# Altium PCB HANDS_FREE_Power_Manager_V1.PcbDoc
Units mil, origin at the board's own origin, x right, y up, seen from the top; angles counter-clockwise.
Board outline 6495 x 2557 mil, 2 copper layers (Top Layer, Bottom Layer); 43 components, 19 nets, 152 pads, 96 vias.
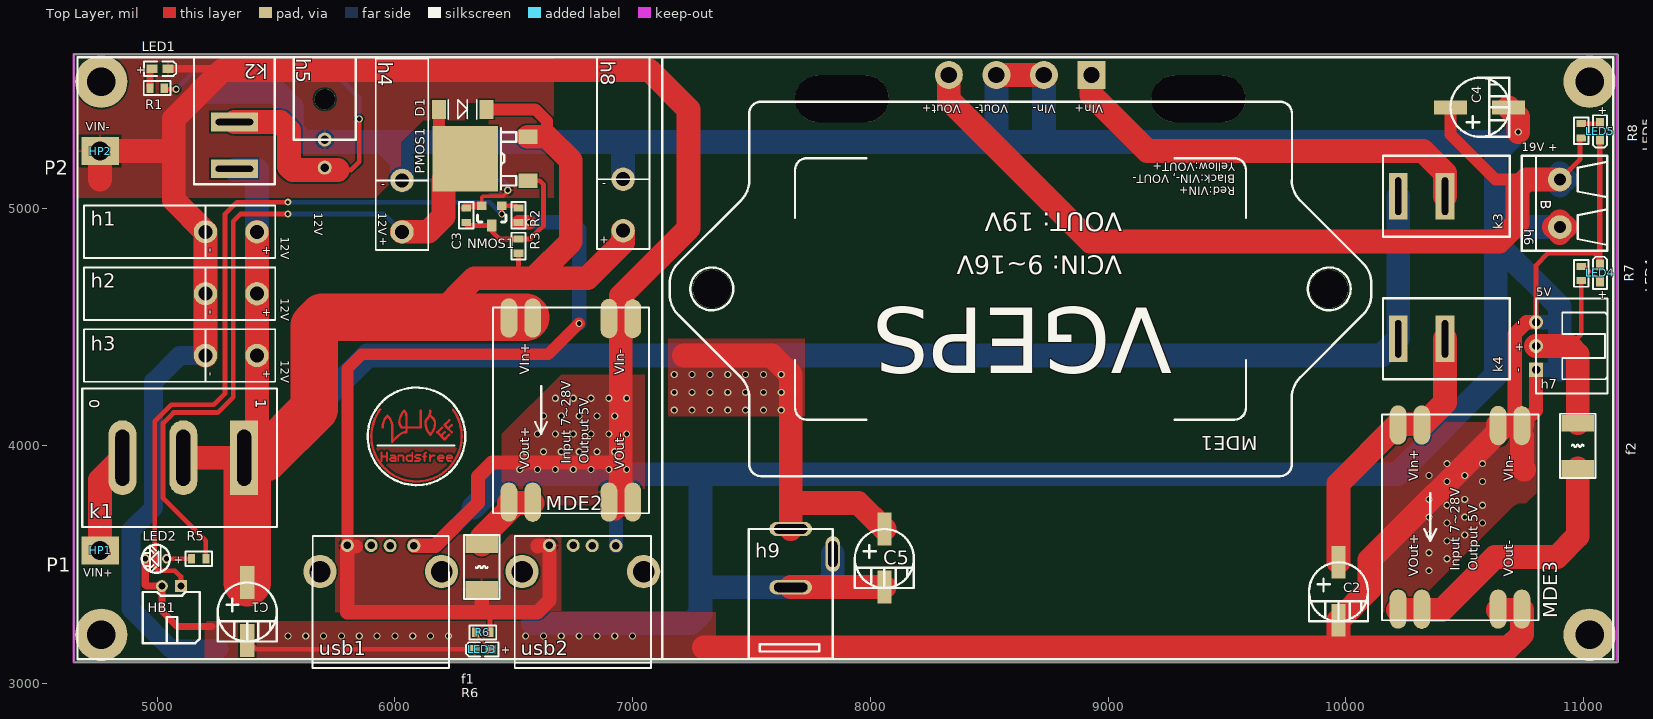
[diagram p0: Top Layer view]
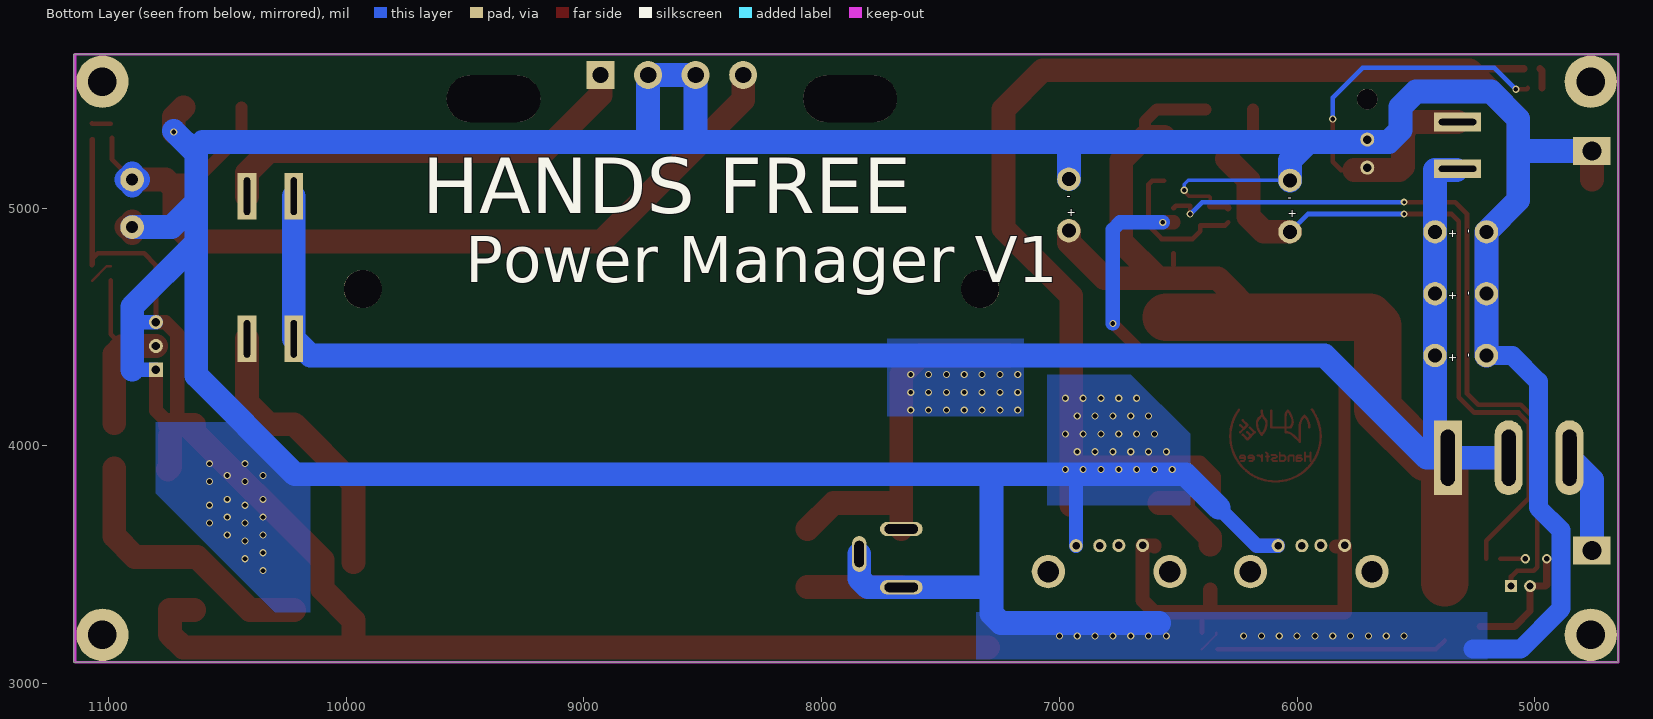
[diagram p1: Bottom Layer view, seen from below]

## Layer stack, top to bottom
Top Layer: signal copper 1.4
Dielectric: dielectric 12.6, FR-4, Dk 4.8
Bottom Layer: signal copper 1.4

## Board outline
4650,3090 11145,3090 11145,5647 4650,5647

## Design rules (kind name [scope] priority, off if disabled: settings)
Clearance [All] p1: gap=7
ComponentClearance [All] p1 off: gap=10 collisioncheckmode=3 verticalgap=10 showdistances=FALSE
Height [All] p1 off: minheight=0 maxheight=1000 prefheight=500
HoleSize [All] p1: absolutevalues=TRUE maxlimit=500 minlimit=1 maxpercent=80.000 minpercent=20.000
HoleToHoleClearance [All] p1: gap=6 allowstackedmicrovias=TRUE
MinimumSolderMaskSliver [All] p1: minsoldermaskwidth=0
PolygonConnect [All] p1: connectstyle=Relief reliefconductorwidth=10 reliefentries=4 polygonreliefangle="90 Angle"
RoutingVias [All] p1: holewidth=28 width=50 viastyle="Through Hole" minholewidth=10 minwidth=20 maxholewidth=50 maxwidth=50
SilkToSilkClearance [All] p1: silktosilkclearance=0
SilkscreenOverComponentPads SilkToSolderMaskClearance [IsPad] p1: minsilkscreentomaskgap=0
SolderMaskExpansion [All] p1: expansion=4
Width [All] p1: maxlimit=200 minlimit=7 preferedwidth=7
21 further rules are at their usual default settings.

## Components (designator, comment, footprint, x,y, rotation, side; value= is the part's Value field where it differs from the comment)
C1 "ELE_Cap_Pole" ELE_铝解电容_PV_6.3 5380,3300 r90 top
C2 "ELE_Cap_Pole" ELE_铝解电容_PV_6.3 9970,3385 r90 top
C3 "20nf" ELE_0603_P 6300,4970 r270 top
C4 "ELE_Cap_Pole" ELE_铝解电容_PV_6.3 10565,5425 r180 top
C5 "ELE_Cap_Pole" ELE_铝解电容_PV_6.3 8060,3525 r90 top
D1 "SS34" ELE_D1206 6185,5315 r0 top
f1 "ELE_Standard_Fuze_1812/3A" ELE_FUZE_1812 6360,3420 r90 top
f2 "ELE_Standard_Fuze_1812/3A" ELE_FUZE_1812 10980,4070 r270 top
h1 "HDR_Header_Power_2P" HDR_MOLEX_POWER5557_DH_2P 5420,4900 r180 top
h2 "HDR_Header_Power_2P" HDR_MOLEX_POWER5557_DH_2P 5420,4640 r180 top
h3 "HDR_Header_Power_2P" HDR_MOLEX_POWER5557_DH_2P 5420,4380 r180 top
h4 "HDR_Header_Power_2P" HDR_MOLEX_POWER5557_DH_2P 6030,4900 r90 top
h5 "HDR_Header_Power_2P" HDR_MOLEX_CANMX3.0_DH_2P 5705,5170 r90 top
h6 "HDR_Header_1*2" HDR_KF300_DH_2P 10900,5120 r270 top (schematic designator H6)
h7 "HDR_Header_Power_3P" HDR_Header_XH2.54_DH_1*3 10800,4320 r90 top
h8 "HDR_Header_Power_2P" HDR_MOLEX_POWER5557_DH_2P 6960,4905 r90 top
h9 "HDR_DC005插座_DH_3P" ELE_DC005插座_DV 7665,3405 r90 top
HB1 "HDR_Header_1*2" HDR_Header_2.00_DH_1*2 5100,3410 r180 top
HP1 "HDR_Header_1*1" HDR_H_DH_1P 4760,3560 r0 top
HP2 "HDR_Header_1*1" HDR_H_DH_1P 4760,5240 r0 top
k1 "ELE_Standard_Switch2" ELE_船型开关2_D 5440,4020 r270 top
k2 "ELE_Standard_Switch2" ELE_船型开关1_D 5325,5165 r180 top
k3 "ELE_Standard_Switch2" ELE_船型开关1_D 10220,5050 r90 top
k4 "ELE_Standard_Switch2" ELE_船型开关1_D 10220,4450 r90 top
LED1 "ELE_LED" ELE_0603极性_P 4990,5590 r0 top
LED2 "ELE_LED_DV_3mm" ELE_LED_DV 5045,3525 r180 top
LED3 "ELE_LED" ELE_0603极性_P 6390,3140 r180 top
LED4 "ELE_LED" ELE_0603极性_P 11065,4705 r90 top
LED5 "ELE_LED" ELE_0603极性_P 11073,5345 r270 top
MDE1 "MDE_12To19V模块_Fixed" MDE_12To19V模块_Fixed 9930,4660 r180 top
MDE2 "MDE_DM02-5.0" MDE_DM02-5.0#1 6740,4150 r90 top
MDE3 "MDE_DM02-5.0" MDE_DM02-5.0#2 10480,3700 r90 top
NMOS1 "AO3400" CHP_SOT23_P_3P 6450,5010 r180 top
PMOS1 "IRFR5305TRPBF" CHP_TOD252 6300,5020 r90 top
R1 "10k" ELE_0603_P 5000,5505 r180 top
R2 "10k" ELE_0603_P 6520,4970 r90 top
R3 "10k" ELE_0603_P 6520,4840 r90 top
R5 "10k" ELE_0603_P 5175,3525 r180 top
R6 "10k" ELE_0603_P 6370,3215 r0 top
R7 "10k" ELE_0603_P 10990,4725 r270 top
R8 "20k" ELE_0603_P 10990,5325 r270 top
usb1 "USBA" HDR_USBA_DH 5800,3580 r90 top
usb2 "USBA" HDR_USBA_DH 6650,3580 r90 top

## Footprints (in the part's own frame and the unit in brackets; to place one, negate y for a bottom-side part, rotate by r counter-clockwise, add the part's x,y. Pads: shape width x height; smd on the part's side, far side on the other; paste and mask are expansions set on the pad)
CHP_SOT23_P_3P [mil]
  rect 40x36 smd: 1(0,0) 2(85,0)
  rect 40x50 smd: 3(43,83)
  silkscreen extent -18,39 103,69
CHP_TOD252 [mm]
  rect 1.5x2 smd: 1(2.413,-6.604) 2(7.112,-6.604)
  rect 7x7 smd: 3(4.751,0.127)
  silkscreen extent 1.51,-5.33 8,-3.71
ELE_0603_P [mil]
  rect 30x40 smd: 1(-30,0) 2(30,0)
  silkscreen extent -56,-30 56,30
ELE_0603极性_P [mil]
  rect 45x35.43 smd: 1(-11.46,-4) 2(55.46,-4)
  silkscreen extent -45,-34 91,26
ELE_D1206 [mm]
  rect 1.5x2 smd: 1(0,2.54) 2(5.08,2.54)
  silkscreen extent 1.02,1.52 4.06,3.56
ELE_DC005插座_DV [mil]
  oval 60x180 hole 40 slot 140 at 90 deg: 1(0,0) 3(245,0)
  oval 150x60 hole 40 slot 110 at 0 deg: 2(140,-177)
  silkscreen extent -300,-177 245,177
ELE_FUZE_1812 [mm]
  rect 1.8x3.5 smd: 1(-0.635,-0.127) 2(4.191,-0.127)
  silkscreen extent -1.65,-2.03 5.21,1.78
ELE_LED_DV [mm] "Connector; Header"
  round 1 hole 0.6: 1(0.127,0) 2(2.413,0)
  silkscreen extent -0.23,-1.5 2.77,1.5
ELE_船型开关1_D [mm]
  rect 5x2 hole 0.65 slot 4 at 0 deg: 1(0,0) 2(0,-5.004)
  silkscreen extent -4.32,-11.94 4.32,1.63
ELE_船型开关2_D [mm]
  rect 8x3 hole 1.5 slot 6 at 0 deg: 1(1.778,-1.88)
  oval 8x3 hole 1.5 slot 6 at 0 deg: 1(1.778,-8.379) 2(1.778,-14.879)
  silkscreen extent -5.62,-19.17 9.18,1.63
ELE_铝解电容_PV_6.3 [mm]
  rect 3.5x1.5 smd: 1(3.175,0.025) 2(-3.023,0.025)
  silkscreen extent -3.12,-3.12 3.17,3.18
HDR_H_DH_1P [mm]
  rect 4x3 hole 2: 1(0,0)
HDR_Header_2.00_DH_1*2 [mil]
  rect 50x50 hole 30: 1(0,0)
  round 50 hole 30: 2(80,0)
  silkscreen extent -80,25 160,240
HDR_Header_XH2.54_DH_1*3 [mm] "Connector; Header; 2 Position;"
  rect 1.5x1.5 hole 0.9: 1(0,0)
  round 1.5 hole 0.9: 2(2.54,0) 3(5.08,0)
  silkscreen extent -2.54,-7.62 7.62,0
HDR_KF300_DH_2P [mil]
  round 100 hole 50: 1(0,0) 2(200,0)
  Top Layer lines w100: 200,-25 200,0 ; 225,0 200,0 ; 175,0 200,0 ; 200,25 200,0
  Bottom Layer lines w100: 0,-25 0,0 ; 25,0 0,0 ; -25,0 0,0 ; 0,25 0,0
  silkscreen extent -100,-160 300,200
HDR_MOLEX_CANMX3.0_DH_2P [mm]
  round 1.5 hole 0.9: 1(0,0) 2(3,0)
  round 2.2 hole 2.2: 3(7.315,0)
  silkscreen extent 3,-3.3 11.81,3.3
HDR_MOLEX_POWER5557_DH_2P [mm]
  round 2.5 hole 1.5: 1(0,0) 2(5.5,0)
  silkscreen extent -1.95,-2.8 18.5,2.8
HDR_USBA_DH [mm]
  round 1.4 hole 0.8: 1(0.028,0) 2(0.028,-2.54) 3(0,-4.572) 4(0,-7.112)
  round 3.556 hole 2.286: G1(-2.767,2.921) G2(-2.771,-10.068)
  silkscreen extent -13.08,-10.85 1.02,3.71
MDE_12To19V模块_Fixed [mm]
  round 4.064 hole 4.064: 0(0,0) 0(65.964,0)
  oval 10x5 hole 5 slot 10 at 0 deg: 0(13.97,-20.32) 0(52.07,-20.32)
  rect 3x3 hole 1.75: 1(25.4,-22.86)
  round 3 hole 1.75: 2(30.48,-22.86) 3(35.56,-22.86) 4(40.64,-22.86)
  silkscreen extent -4.5,-20 70.46,20
MDE_DM02-5.0#1 [mm] "U?"
  round 1.8 smd: 1(-11.014,6.613) 2(-11.033,4.073) 3(-11.014,-4.073) 4(-11.013,-6.613) 5(10.959,-6.613) 6(10.982,-4.073) 7(11.033,4.073) 8(11.033,6.613)
  rect 2.2x1.8 smd: 1(-9.923,6.613) 2(-9.923,4.073) 3(-9.922,-4.073) 4(-9.897,-6.613) 5(9.867,-6.613) 6(9.867,-4.073) 7(9.937,4.073) 8(9.937,6.613)
  oval 2x1.8 smd: 1(-8.732,6.613) 2(-8.732,4.073) 3(-8.731,-4.073) 4(-8.731,-6.613) 5(8.678,-6.613) 6(8.678,-4.073) 7(8.748,4.073) 8(8.748,6.613)
  silkscreen extent -11.01,-8.37 10.99,8.33
MDE_DM02-5.0#2 [mm] "U?"
  round 1.8 smd: 1(-11.014,6.613) 2(-11.033,4.073) 3(-11.014,-4.073) 4(-11.013,-6.613) 5(10.959,-6.613) 6(10.982,-4.073) 7(11.033,4.073) 8(11.033,6.613)
  rect 2.2x1.8 smd: 1(-9.923,6.613) 2(-9.923,4.073) 3(-9.922,-4.073) 4(-9.897,-6.613) 5(9.867,-6.613) 6(9.867,-4.073) 7(9.937,4.073) 8(9.937,6.613)
  oval 2x1.8 smd: 1(-8.732,6.613) 2(-8.732,4.073) 3(-8.731,-4.073) 4(-8.731,-6.613) 5(8.678,-6.613) 6(8.678,-4.073) 7(8.748,4.073) 8(8.748,6.613)
  Top Layer lines w0.4: 8.748,4.113 9.389,3.471
  silkscreen extent -11.01,-8.37 10.99,8.33

## Part data
C1 C2 C4 C5: "贴"
C3: library part ELE_Cap, "ÌùÆ¬ µçÈ"
D1: library part ELE_Diode, "贴片 二"
f1 f2: "贴片保险丝"
h1 h2 h3 h4 h5 h8: "Ö±²å 5557½ÓÍ"
h7: "5V专用 直插 XH2.54 3P接头"
h9: "ֱ"
k1 k2 k3 k4: "直插 船"
LED1 LED3 LED4 LED5: "发光"
LED2: "发光二极管 直插 3mm"
MDE1: "19V升"
NMOS1: library part ELE_NMOS_1, "贴片 NMOS管 S"
PMOS1: library part ELE_PMOS_1, "贴片 PMOS管 S"
R1 R2 R3 R5 R6 R7 R8: library part ELE_Standard_R50R, "贴片 电阻"
usb1 usb2: library part HDR_USB_HOST, "直插 US"

## Free pads (board coordinates)
  round 220 hole 120: 0(4765,3205) 0(4765,5532) 0(11025,3205) 0(11025,5532)

## Via types
v1: diameter 30, hole 20, Top Layer to Bottom Layer, 94 vias
v2: diameter 30, hole 15, Top Layer to Bottom Layer, 2 vias

## Nets (pads, with @x,y where several pads share a name; then routed paths per layer and width w, separated by ;. In a path a pad name is that pad's centre, name@x,y a point inside that pad or via, vN(x,y) a via of type N, cw(c..) or ccw(c..) an arc to the next point about the centre after c; other vN are vias at no path point)
AVCC5.0: f2.1 h7.2 R7.2 | length 775.2
  Top Layer w20: 10940,4420 10990,4470 R7.2
  Top Layer w100: h7.2 10940,4420 10975,4385 f2.1
AVCC19.0: C4.1 h6.1 MDE1.4 R8.2 | length 3837
  Top Layer w20: h6.1 10985,5205 R8.2@10985,5295
  Top Layer w50: C4.1 10440,5310 10630,5120 10760,5120
  Top Layer w100: MDE1.4 8330,5455 8925,4860 10645,4860 10722.5,4937.5 10722.5,5082.5 10760,5120 h6.1
DVCC5.0: f1.1 R2.1 R6.2 usb1.1 usb2.1 | length 4096.5
  Top Layer w20: R6.2 6400,3285
  Top Layer w50: usb1.1@5800,3576.11 usb1.1 5800,4325 5860,4385 6645,4385 v1(6775,4515)
  Top Layer w60: 5835.44,3576.11 5800,3576.11 5800,3300 6365,3300 ; f1.1 6365,3300 ; R2.1 v1(6565,4940) ; 6600,3578.06 6600,3581.11 usb2.1 6650,3350 6600,3300 6365,3300
  Bottom Layer w60: v1(6565,4940) 6745,4940 6775,4910 v1(6775,4515)
GND: C1.2 C2.2 C3.1 C4.2 C5.2 h1.2 h2.2 h3.2 h4.2 h5.2 h6.2 h7.1 h7.3 h8.2 h9.1 h9.2 HB1.2 HP2.1 LED1.2 LED2.2 LED3.2 LED4.2 LED5.2 MDE1.2 MDE1.3 MDE2.3 MDE2.4 MDE2.5 MDE2.6 MDE3.3 MDE3.4 MDE3.5 MDE3.6 NMOS1.2 usb1.4 usb2.4 | length 37431.4
  Top Layer w15: NMOS1.2 6365,5045 6370,5050 6455,5050 6475,5070 v1(6475,5075)
  Top Layer w20: C1.2 5416,3144 LED3.2 ; h7.3 10800,4760 10850,4810 11045,4810 11066,4789 ; LED5.2@11066,5289.54 11066,4789 ; LED5.2 LED4.2 11066,4763.46 11066,4789
  Top Layer w30: LED2.2 4950,3415 4955,3410 HB1.2 5020,3305 5085,3240 5230,3240 ; LED1.2 6094,5586 6100,5580 ; C3.1@6290,5000 6300,5010 NMOS1.2
  Top Layer w60: usb1.4 6170,3580 6350,3760 6350,3870 6410,3930 6950,3930 ; MDE2.3@6930,3716.37 MDE2.3@6930,3729.73 ; h7.1 10800,4148.11 10740.35,4088.47 10710,4118.82 10710,4470 10760,4520 h7.3
  Top Layer w100: 4760,5120 HP2.1 5070,5240 ; h3.2 h2.2 h1.2 5070,5033.46 5070,5375 5275,5580 6100,5580 7070,5580 7235,5415 7235,4915 6950,4630 6950,3930 6950,3750 ; 7300,3152 9975,3152 ; h9.1 7666,3406 C5.2 ; MDE1.3 MDE1.2 ; 9969,3179 9975,3173 9975,3152 ; 9969,3181 C2.2 10100,3397 10100,3520 MDE3.6@10668.47,4088.47 ; MDE3.3@10640.35,3309.37 10739.35,3309.37 10740.35,3310.37 10740.35,3266.41 10740.35,3207.35 10685,3152 9975,3152 ; MDE3.6@10640.35,4088.47 MDE3.6@10668.47,4088.47 ; C4.2 10725,5383 v1(10725,5320) ; MDE3.5@10740.35,4041.65 10740.35,3909.65 10750,3900 ; MDE3.5@10740.35,4088.47 MDE3.6@10668.47,4088.47
  Bottom Layer w15: h4.2 6458.46,5116.54 6475,5100 v1(6475,5075)
  Bottom Layer w60: usb1.4 6170,3580 6330,3740 ; usb2.4 6930,3855 ; h7.1 10900,4320 ; h7.3 10900,4520
  Bottom Layer w80: h3.2 5095,4380 4985,4270 4985,3740 4890,3645 4890,3315 5060,3145 5260,3145
  Bottom Layer w100: HP2.1 5070,5240 ; h3.2 h2.2 h1.2 5070,5033.46 5070,5375 5185,5490 5500,5490 5565,5425 5565,5328.11 5615,5278.11 5951.89,5278.11 ; h4.2 6030,5200 5951.89,5278.11 ; 6330,3740 6470,3880 7285,3880 ; 6580,3255 7245,3255 7285,3295 7285,3405 ; h8.2 6960,5273.11 6955,5278.11 ; h9.2 7842,3442 7805,3405 h9.1 7285,3405 ; 10640,5240 v1@10725,5325 ; 10900,4320 10900,4520 10900,4585 10630,4855 ; h6.2 10735,4920 10630,5025 ; 5951.89,5278.11 6955,5278.11 ; 6955,5278.11 8530,5278.11 ; 7285,3405 7285,3880 ; 7285,3880 10215,3880 10630,4295 10630,4855 ; 8530,5278.11 MDE1.3 MDE1.2 8730,5278.11 ; 8530,5278.11 8730,5278.11 ; 8730,5278.11 10603.11,5278.11 10630,5251.22 10630,5025 ; 10630,4855 10630,5025
  other v1: 5550,3200 5625,3200 5700,3200 5775,3200 5850,3200 5925,3200 6000,3200 6075,3200 6150,3200 6225,3200 6550,3200 6625,3200 6700,3200 6775,3200 6850,3200 6925,3200 7000,3200 10350,3475 10425,3525 10350,3550 10425,3600 10350,3625 10500,3625 10425,3675 10575,3675 10350,3700 10500,3700 10425,3750 10575,3750 10350,3775 10500,3775 10425,3850 10575,3850 10350,3875 10500,3875 6525,3900 6600,3900 6675,3900 6750,3900 6825,3900 6900,3900 6975,3900 10425,3925 10575,3925 6550,3975 6625,3975 6700,3975 6775,3975 6850,3975 6925,3975 6600,4050 6675,4050 6750,4050 6825,4050 6900,4050 6975,4050 6625,4125 6700,4125 6775,4125 6850,4125 6925,4125 6675,4200 6750,4200 6825,4200 6900,4200 6975,4200
NetC2_1: C2.1 k4.2 MDE3.7 MDE3.8 | length 1188
  Top Layer w100: C2.1 9969,3840.57 10219.65,4091.21 10319.65,4091.21 10326.21,4091.21 10417,4182 k4.2
NetC3_2: C3.2 NMOS1.3 PMOS1.1 R3.2 | length 647
  Top Layer w20: C3.2@6290,4940 6303,4927 NMOS1.3 6407,4903 6440,4870 R3.2 6570,4870 6625,4925 6625,5100 6610,5115 PMOS1.1
NetD1_1: D1.1 h4.1 PMOS1.3 R5.1 | length 3214
  Top Layer w20: R5.1 5205,3600 5025,3780 5025,4096 5069,4140 5255,4140 5320,4205 5320,4945 5350,4975 v2(5550,4975)
  Top Layer w50: D1.1 6185,5317.03 PMOS1.3
  Top Layer w100: h4.1 6140,4900 6205,4965 6205,5117.03 PMOS1.3
  Bottom Layer w20: v2(5550,4975) 5955,4975 h4.1
Netf1_2: f1.2 MDE2.1 MDE2.2 | length 335.1
  Top Layer w100: f1.2 6365,3615 MDE2.1@6509.33,3759.33 ; MDE2.1@6479.65,3759.33 MDE2.2@6579.65,3759.33 ; 6539.33,3759.33 6540,3760
Netf2_2: f2.2 MDE3.1 MDE3.2 | length 1169
  Top Layer w100: MDE3.1@10219.65,3309.33 10319.65,3309.33 10404.33,3309.33 10627.5,3532.5 10887.5,3532.5 10975,3620 f2.2
Neth5_1: h5.1 k2.2 R1.1 | length 1892.2
  Top Layer w20: R1.1 5035,5500 v1(5080,5500) ; 5760,5160 5815,5160 5850,5195 v1(5850,5375)
  Top Layer w100: k2.2 5518,5362 5555,5325 5555,5175 5570,5160 5760,5160
  Bottom Layer w20: v1(5080,5500) 5170,5590 5725,5590 5850,5465 v1(5850,5375)
NetHB1_1: HB1.1 NMOS1.1 R2.2 | length 3193.6
  Top Layer w20: HB1.1 5100,3450 5075,3475 5005,3475 4990,3490 4990,4103 5060,4173 5238,4173 5285,4220 5285,4975 5335,5025 v2(5550,5025) ; v1(6450,4975) NMOS1.1 6510,5010 R2.2
  Bottom Layer w20: v2(5550,5025) 6400,5025 v1(6450,4975)
NetHP1_1: HP1.1 k1.2 | length 858.1
  Top Layer w100: HP1.1 4760,3855.78 k1.2
  Bottom Layer w100: HP1.1 4760,3855.78 k1.2
Netk3_2: k3.2 MDE1.1 | length 1805.4
  Top Layer w100: MDE1.1 8930,5475 9165,5240 10325,5240 10417,5148 k3.2
NetLED1_1: LED1.1 R1.2 | length 84.5
  Top Layer w30: R1.2 4970,5577.46 LED1.1
NetLED2_1: LED2.1 R5.2 | length 105
  Top Layer w20: LED2.1 R5.2
NetLED3_1: LED3.1 R6.1 | length 96.5
  Top Layer w10: R6.1 6340,3205.46 LED3.1
NetLED4_1: LED4.1 R7.1 | length 104.5
  Top Layer w10: R7.1 11007.54,4755 LED4.1
NetLED5_1: LED5.1 R8.1 | length 79.6
  Top Layer w20: R8.1 11067.53,5355 LED5.1
VCCIN: C1.1 C5.1 D1.2 h1.1 h2.1 h3.1 h8.1 h9.3 k1.1 k2.1 k3.1 k4.1 MDE2.7 MDE2.8 PMOS1.2 R3.1 | length 14200.2
  Top Layer w20: 6520,4760.61 R3.1
  Top Layer w50: D1.2 6590,5415 6640,5365 6640,5300
  Top Layer w100: k1.1@5110.11,3950 k1.1@5366,3950 ; k1.1@5420,3950 h3.1 h2.1 h1.1 ; 6170,4540 6335,4705 6585,4705 ; PMOS1.2 6640,5300 6740,5200 6740,4860 6585,4705 ; h8.1 6960,4855 6810,4705 6585,4705 ; 7215,4380 7585,4380 7665,4300 7665,3760 ; h9.3 7665,3760 ; C5.1 7949,3760 7665,3760
  Top Layer w200: C1.1 k1.1@5379,3909 ; k1.1@5420,3950 5455,3950 5660,4155 5660,4505 5695,4540 6170,4540 MDE2.7@6550,4540
  Bottom Layer w100: k1.1@5110.11,3950 5366,3950 k1.1@5420,3950 ; k2.1@5330,5160 5420,5160 h1.1 h2.1 h3.1 k1.1@5420,3950 ; k3.1 k4.1 10150,4380 5885,4380 5455,3950 k1.1@5420,3950
  other v1: 7175,4150 7250,4150 7325,4150 7400,4150 7475,4150 7550,4150 7625,4150 7175,4225 7250,4225 7325,4225 7400,4225 7475,4225 7550,4225 7625,4225 7175,4300 7250,4300 7325,4300 7400,4300 7475,4300 7550,4300 7625,4300
pads on no net: h5.3 MDE1.0 usb1.2 usb1.3 usb1.G1 usb1.G2 usb2.2 usb2.3 usb2.G1 usb2.G2
copper on no net: | length 2518.9
  Top Layer w8: 5944,3937 5944,3972 ; 5944,3954.5 5967.5,3954.5 ; 5967.5,3937 5967.5,3972 ; 5984,3960 5997,3960 6002,3955 6002,3937 5985,3937 5979,3943 5985,3949 5999,3949 6002,3946 ; 6014,3937 6014,3960 6032,3960 6037,3955 6037,3937 ; 6072,3960 6055,3960 6049,3954 6049,3943 6055,3937 6072,3937 6073,3938 6073,3972 ; 6084,3937 6101,3937 6107,3943 6101,3949 6090,3949 6084,3955 6090,3961 6107,3961 ; 6119,3955 6131,3955 ; 6125,3937 6125,3967 6131,3973 ; 6148,3937 6148,3961 ; 6148,3949 6159,3960 6166,3960 ; 6182,3948 6204,3948 6205,3949 6205,3955 6200,3960 6188,3960 6182,3954 6182,3943 6188,3937 6200,3937 ; 6218,3948 6240,3948 6241,3949 6241,3955 6236,3960 6224,3960 6218,3954 6218,3943 6224,3937 6236,3937
  Top Layer w10: 5938.04,4152.71 ccw(c6091,4040) 6244.31,4152.23 ; 5949,4077 5949,4078.72 cw(c6017.28,4078.72) 5969,4127 cw(c5920.72,4078.72) 5989,4078.72 5989,4017 6014.86,4042.86 cw(c6049,4008.72) 6049,4057 6049,4122.86 ccw(c6014.86,4122.86) 6039,4147 ccw(c6087.28,4098.72) 6019,4098.72 ccw(c6047.28,4098.72) 6027.28,4078.72 ccw(c6031.43,4082.86) 6031.43,4077 6109,4077 6109,4147 ; 6149,4127 6160.72,4115.28 cw(c6140.72,4095.28) 6169,4095.28 cw(c6100.72,4095.28) 6149,4047 cw(c6197.28,4095.28) 6129,4095.28 6129,4098.72 cw(c6149,4098.72) 6134.86,4112.86 ccw(c6100.72,4147) 6149,4147 ; 6194,4042 6209,4057 ; 6199,4077 6179,4057 6209,4027 6229,4047 ; 6224,4072 6239,4087 ; 6229,4107 6209,4087 6239,4057

## Polygon pours and split planes (outlines as drawn)
GND on Top Layer "Top Overlay-No Net" (solid, remove dead copper, pour order 22): 4619,5044 4619,5669 5044,5669 6669,5669 6669,5569 6669,5044 6694,5044 6394,5044 6394,5444 6369,5444 6294,5444 6294,5369 6119,5369 6044,5294 6024,5274 6024,5110.54 5985.54,5110.54 5919,5044
DVCC5.0 on Top Layer "Top Overlay-No Net" (solid, remove dead copper, pour order 21): 5750,3625 5750,3300 6075,3300 6700,3300 6700,3625
GND on Top Layer "Top Overlay-No Net" (solid, remove dead copper, pour order 19): 5200,3000 5200,3300 5300,3300 7350,3300 7350,3000
GND on Top Layer "Top Overlay-No Net" (solid, remove dead copper, pour order 17): 10150,3300 10300,3300 10500,3500 10800,3800 10800,4000 10800,4100 10150,4100
GND on Top Layer "Top Overlay-No Net" (solid, remove dead copper, pour order 15): 6350,3950 6700,4300 6800,4300 7050,4300 7050,3750 6450,3750 6450,4050
VCCIN on Top Layer "Top Overlay-No Net" (solid, remove dead copper, pour order 13): 7150,4450 7150,4125 7725,4125 7725,4450
GND on Bottom Layer "Top Overlay-No Net" (solid, remove dead copper, pour order 20): 5200,3050 5200,3300 5800,3300 7350,3300 7350,3050
GND on Bottom Layer "Top Overlay-No Net" (solid, remove dead copper, pour order 18): 10150,3300 10150,3850 10350,4050 10400,4100 10800,4100 10800,3800 10300,3300 10200,3300
GND on Bottom Layer "Top Overlay-No Net" (solid, remove dead copper, pour order 16): 6450,4050 6700,4300 7050,4300 7050,3750 6450,3750
VCCIN on Bottom Layer "Top Overlay-No Net" (solid, remove dead copper, pour order 14): 7150,4450 7150,4125 7600,4125 7725,4125 7725,4450
no net on Top Solder "Top Overlay-No Net" (solid, remove dead copper, pour order 4): 5869,3995 6309,3995 6309,3802 6309,3808.23 5869,3808.23
no net on Top Solder "Top Overlay-No Net" (solid, remove dead copper, pour order 4): 5868.48,3994.88 6308.48,3994.88 6308.48,3801.88 6308.48,3808.11 5868.48,3808.11

## Keep-outs
Keep-Out Layer:
  lines w10: 4650,3090 11140,3090 11140,5647 4650,5647 4650,3090

## Silkscreen, mask and mechanical layers (free items; w line width, h text height)
Top Overlay:
  circle w10: c6091,4040 r205.28
  lines w8: 5927,4002 6252,4002
  lines w10: 7125,3101.65 7125,5635 ; 4665,3101.65 4665,5635 11125,5635 11125,3101.65 4665,3101.65
  text "+" at 4910,5565 h35.43
  text "+" at 11060,5395 h35.43
  text "VIN-" at 4700,5325 h35.43
  text "19V +" at 10740,5240 h35.43
  text "12V" at 5660,4980 h35.43 r270
  text "12V" at 5930,4980 h35.43 r270
  text "12V" at 5520,4880 h35.43 r270
  text "5V" at 10800,4630 h35.43
  text "12V" at 5520,4620 h35.43 r270
  text "+" at 11060,4620 h35.43
  text "-" at 10740,4510 h35.43 r90
  text "+" at 10710,4400 h35.43
  text "12V" at 5520,4360 h35.43 r270
  text "-" at 10740,4310 h35.43 r90
  text "+" at 5070,3505 h35.43
  text "VIN+" at 4690,3450 h35.43
  text "+" at 6445,3125 h35.43
Bottom Overlay:
  text "HANDS FREE" at 9680,4900 h400
  text "Power Manager V1" at 9500,4625 h330
Top Solder:
  lines w8: 5944,3937 5944,3972 ; 5944,3954.5 5967.5,3954.5 ; 5967.5,3937 5967.5,3972 ; 5984,3960 5997,3960 6002,3955 6002,3937 5985,3937 5979,3943 5985,3949 5999,3949 6002,3946 ; 6014,3937 6014,3960 6032,3960 6037,3955 6037,3937 ; 6072,3960 6055,3960 6049,3954 6049,3943 6055,3937 6072,3937 6073,3938 6073,3972 ; 6084,3937 6101,3937 6107,3943 6101,3949 6090,3949 6084,3955 6090,3961 6107,3961 ; 6119,3955 6131,3955 ; 6125,3937 6125,3967 6131,3973 ; 6148,3937 6148,3961 ; 6148,3949 6159,3960 6166,3960 ; 6182,3948 6204,3948 6205,3949 6205,3955 6200,3960 6188,3960 6182,3954 6182,3943 6188,3937 6200,3937 ; 6218,3948 6240,3948 6241,3949 6241,3955 6236,3960 6224,3960 6218,3954 6218,3943 6224,3937 6236,3937
  lines w10: 5938.04,4152.71 ccw(c6091,4040) 6244.51,4151.96 ; 5949,4077 5949,4078.72 cw(c6017.28,4078.72) 5969,4127 cw(c5920.72,4078.72) 5989,4078.72 5989,4017 6014.86,4042.86 cw(c6049,4008.72) 6049,4057 6049,4122.86 ccw(c6014.86,4122.86) 6039,4147 ccw(c6087.28,4098.72) 6019,4098.72 ccw(c6047.28,4098.72) 6027.28,4078.72 ccw(c6031.43,4082.86) 6031.43,4077 6109,4077 6109,4147 ; 6149,4127 6160.72,4115.28 cw(c6140.72,4095.28) 6169,4095.28 cw(c6100.72,4095.28) 6149,4047 cw(c6197.28,4095.28) 6129,4095.28 6129,4098.72 cw(c6149,4098.72) 6134.86,4112.86 ccw(c6100.72,4147) 6149,4147 ; 6194,4042 6209,4057 ; 6199,4077 6179,4057 6209,4027 6229,4047 ; 6224,4072 6239,4087 ; 6229,4107 6209,4087 6239,4057
  lines w90: 5366,3950 5435,3950 5640,4155 5660,4175 5660,4465 5735,4540 6170,4540 ; 5420,3995 5420,4900 ; 6030,4900 6140,4900 6205,4965 6205,5155 ; 6560,5300 6640,5300 6740,5200 6740,4860 6585,4705 6335,4705 6170,4540 ; 6565,4540 6170,4540 ; 6565,4705 6810,4705 6960,4855 6960,4905
Bottom Solder:
  lines w40: 6080,3580 6170,3580 6330,3740 ; 6930,3580 6930,3860 ; 10800,4320 10900,4320 ; 10800,4520 10900,4520
  lines w70: 7285,3410 7290,3405 7665,3405 ; 7660,3405 7820,3405 7842,3427 7842,3545
  lines w80: 4760,3560 4760,3855.78 4854.22,3950 ; 4760,5240 4863.46,5240 5060,5240 5070,5250 5070,5370 5190,5490 5500,5490 5565,5425 5565,5335 5620,5280 5955,5280 ; 5070,5285 5070,5033.46 5203.46,4900 5203.46,4380 ; 5110.11,3950 5360,3950 ; 5250,3255 6585,3255 7250,3255 7285,3290 7285,3880 ; 5325,5165 5405,5165 5420,5150 5420,4900 5420,4004 5366,3950 ; 5375,3950 5460,3950 5890,4380 6110,4380 6680,4380 10150,4380 10220,4450 10220,5050 ; 6030,5116.54 6030,5205 5955,5280 ; 6330,3740 6470,3880 10210,3880 10630,4300 10630,5010 ; 6960,5121.54 6960,5265 ; 8530,5290 8530,5560 8730,5560 8730,5290 ; 10630,4860 10900,4590 10900,4320 ; 10630,5150 10630,5245 10595,5280 5955,5280 ; 10630,5190 10630,5020 10730,4920 10900,4920

## Dimensions
4650,5647 to 4650,3090 on Top Overlay
4650,5647 to 11140,5647 on Top Overlay

## Text inside footprints (layer, text, board x,y; h text height)
h1: Top Overlay "+" at 5480,4835 h34.45 r180; Top Overlay "-" at 5210,4830 h34.45 r270; Bottom Overlay "+" at 5330,4910 h34.45 r270; Bottom Overlay "-" at 5265,4910 h34.45 r270
h2: Top Overlay "+" at 5480,4575 h34.45 r180; Top Overlay "-" at 5210,4570 h34.45 r270; Bottom Overlay "+" at 5330,4650 h34.45 r270; Bottom Overlay "-" at 5265,4650 h34.45 r270
h3: Top Overlay "-" at 5210,4310 h34.45 r270; Top Overlay "+" at 5480,4315 h34.45 r180; Bottom Overlay "-" at 5265,4390 h34.45 r270; Bottom Overlay "+" at 5330,4390 h34.45 r270
h4: Top Overlay "+" at 5965,4840 h34.45 r90; Top Overlay "-" at 5960,5110 h34.45 r180; Bottom Overlay "+" at 6040,4990 h34.45 r180; Bottom Overlay "-" at 6040,5055 h34.45 r180
h6: Top Overlay "B" at 10820,5035 h45 r270
h8: Top Overlay "-" at 6890,5115 h34.45 r180; Top Overlay "+" at 6895,4845 h34.45 r90; Bottom Overlay "-" at 6970,5060 h34.45 r180; Bottom Overlay "+" at 6970,4995 h34.45 r180
k1: Top Overlay "1" at 5415,4195 h45 r270; Top Overlay "0" at 4715,4195 h45 r270
MDE1: Top Overlay "VOut+" at 8380,5435 h35.43 r180; Top Overlay "VOut-" at 8580,5435 h35.43 r180; Top Overlay "VIn-" at 8780,5435 h35.43 r180; Top Overlay "VIn+" at 8980,5435 h35.43 r180; Top Overlay "Black:VIN-, VOUT-" at 9535,5140 h35.43 r180; Top Overlay "Red:VIN+" at 9535,5090 h35.43 r180; Top Overlay "VGEPS" at 9270,4580 h275.59 r180; Top Overlay "VCIN: 9~16V" at 9060,4800 h78.74 r180; Top Overlay "VOUT: 19V" at 9060,4980 h78.74 r180; Top Overlay "Yellow:VOUT+" at 9535,5190 h35.43 r180
MDE2: Top Overlay "VOut-" at 6965,3900 h39.37 r90; Top Overlay "VOut+" at 6565,3900 h39.37 r90; Top Overlay "VIn-" at 6965,4300 h39.37 r90; Top Overlay "VIn+" at 6565,4300 h39.37 r90; Top Overlay "Input 7~28V" at 6740,3925 h39.37 r90; Top Overlay "Output 5V" at 6815,3925 h39.37 r90
MDE3: Top Overlay "Output 5V" at 10555,3475 h39.37 r90; Top Overlay "Input 7~28V" at 10480,3475 h39.37 r90; Top Overlay "VIn+" at 10305,3850 h39.37 r90; Top Overlay "VIn-" at 10705,3850 h39.37 r90; Top Overlay "VOut+" at 10305,3450 h39.37 r90; Top Overlay "VOut-" at 10705,3450 h39.37 r90